# Altium PCB AEGIS_Junction_Box.PcbDoc (part 2 of 2)
Units mm, origin at the board's own origin, x right, y up, seen from the top; angles counter-clockwise.
Board outline 97 x 168.43 mm, 2 copper layers (TOP, BOTTOM), stack 1.57 mm thick; 144 components, 74 nets, 423 pads, 143 vias.
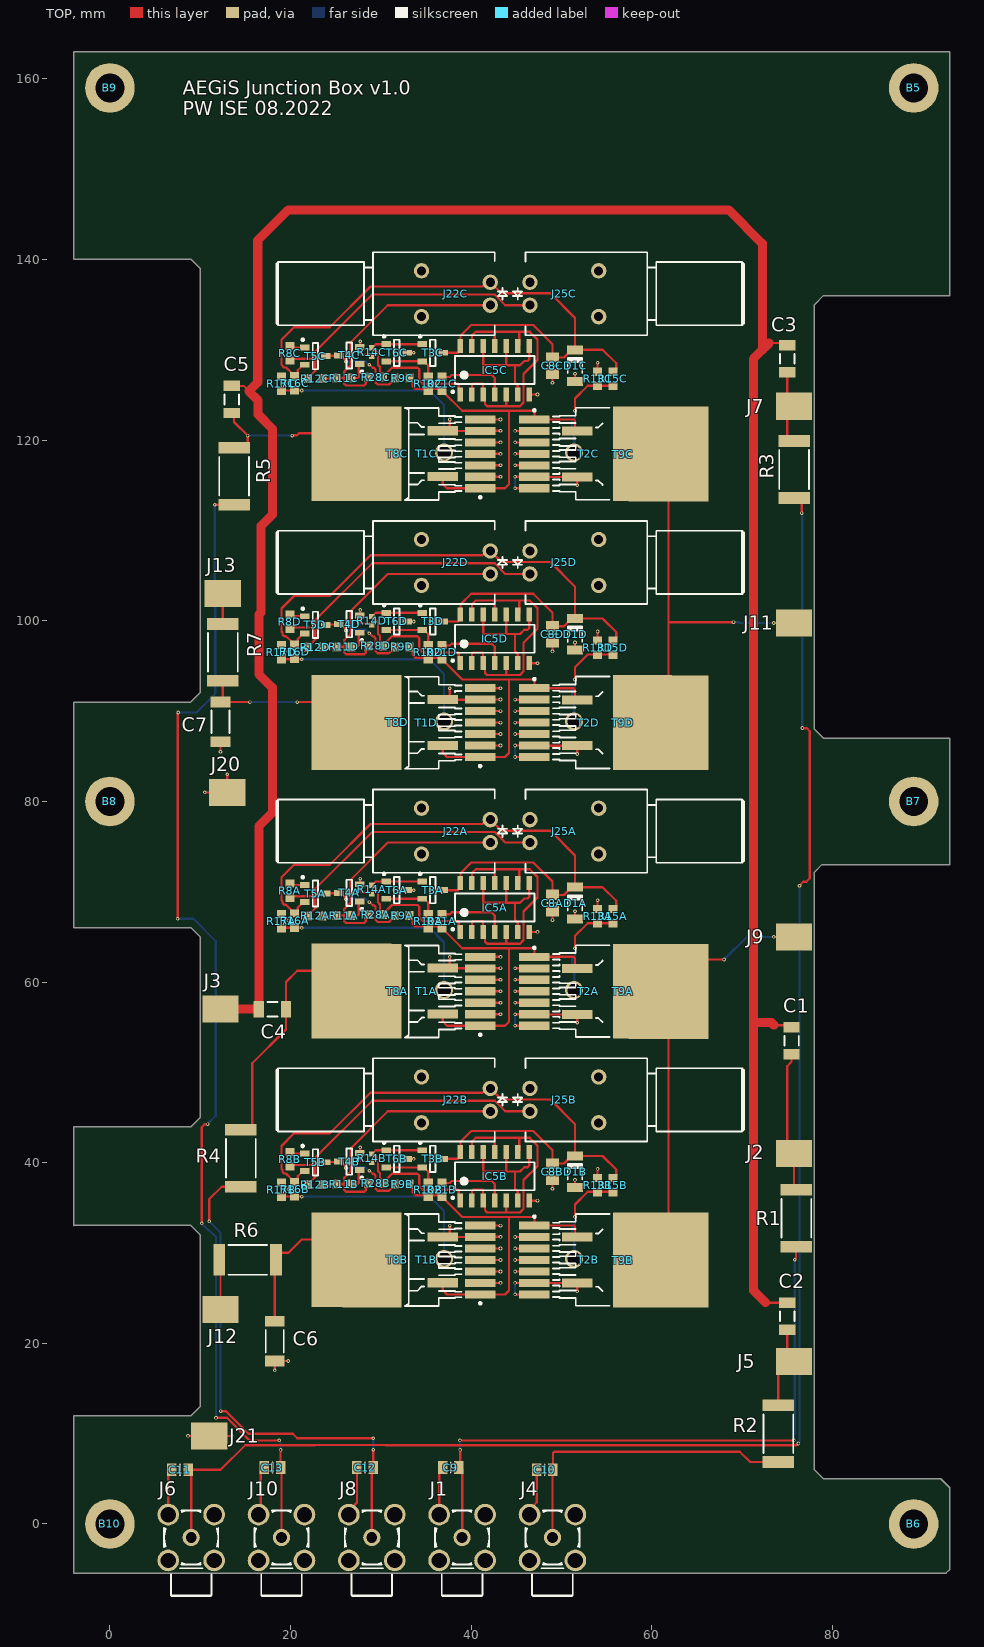
[diagram p0: TOP view]

## Via types
v1: diameter 0.4, hole 0.2, TOP to BOTTOM, tented both sides, 135 vias
v2: diameter 2, hole 1.5, TOP to BOTTOM, tented both sides, 8 vias

## Nets (pads, with @x,y where several pads share a name; then routed paths per layer and width w, separated by ;. In a path a pad name is that pad's centre, name@x,y a point inside that pad or via, vN(x,y) a via of type N, cw(c..) or ccw(c..) an arc to the next point about the centre after c; other vN are vias at no path point) (continued)
NetR13B_1: (continued)
  BOTTOM w0.25: v2(51.4,29.36) 51.4,31.876 51.2,32.076 51.2,32.867 51.5,33.167 v1(51.5,34)
NetR13C_1: R13C.1 R15C.1 SC1C.P | length 11
  TOP w0.25: v1(51.5,123.25) 51.5,124.619 52.906,126.025 54,126.025 55.64,126.025 R15C.1
  BOTTOM w0.25: v2(51.4,118.61) 51.4,121.126 51.2,121.326 51.2,122.117 51.5,122.417 v1(51.5,123.25)
NetR13D_1: R13D.1 R15D.1 SC1D.P | length 11
  TOP w0.25: v1(51.5,93.5) 51.5,94.869 52.906,96.275 54,96.275 55.64,96.275 R15D.1
  BOTTOM w0.25: v2(51.4,88.86) 51.4,91.376 51.2,91.576 51.2,92.367 51.5,92.667 v1(51.5,93.5)
NetR16A_1: R16A.1 R17A.1 SC1A.N | length 24
  TOP w0.25: R17A.1 19.05,66 20.44,66 R16A.1 20.46,66 v1(21.25,66)
  BOTTOM w0.25: v1(21.25,66) 35.392,66 37,64.392 v2(37,59.11)
NetR16B_1: R16B.1 R17B.1 SC1B.N | length 24
  TOP w0.25: R17B.1 19.05,36.25 20.44,36.25 R16B.1 20.46,36.25 v1(21.25,36.25)
  BOTTOM w0.25: v1(21.25,36.25) 35.392,36.25 37,34.642 v2(37,29.36)
NetR16C_1: R16C.1 R17C.1 SC1C.N | length 24
  TOP w0.25: R17C.1 19.05,125.5 20.44,125.5 R16C.1 20.46,125.5 v1(21.25,125.5)
  BOTTOM w0.25: v1(21.25,125.5) 35.392,125.5 37,123.892 v2(37,118.61)
NetR16D_1: R16D.1 R17D.1 SC1D.N | length 24
  TOP w0.25: R17D.1 19.05,95.75 20.44,95.75 R16D.1 20.46,95.75 v1(21.25,95.75)
  BOTTOM w0.25: v1(21.25,95.75) 35.392,95.75 37,94.142 v2(37,88.86)
Resonator: C1.1 C2.1 C3.1 C4.1 C5.1 J3.1 | length 281.8
  TOP w0.2: C5.1 14.803,126 15.383,125.42
  TOP w0.25: 72.609,24.5 C2.1 ; 73,130.75 74.75,130.75 C3.1 ; 73.521,55.229 75.246,55.229 C1.1
  TOP w1: J3.1 C4.1 16.5,77.25 18,78.75 18,92.6 16.5,94.1 16.5,100.672 16.725,100.897 16.725,110.475 18,111.75 18,121.25 16.4,122.85 16.4,124.403 15.383,125.42 16.371,126.408 16.371,142.121 19.75,145.5 68.5,145.5 72.25,141.75 72.25,130.25 ; 72.609,24.5 71.25,25.859 71.25,55.5 ; 73,130.75 72.5,130.25 72.25,130.25 ; 73.521,55.229 73.25,55.5 71.25,55.5 ; 71.25,55.5 71.25,129 72.25,130 72.25,130.25
VCCchA: C8A.2 D1A.1 IC5A.14 J22A.2 R15A.2 R16A.2 T3A.3 T5A.2 | length 72.5
  TOP w0.25: R16A.2@20.335,67.725 20.285,67.725 20.075,67.935 20.075,67.985 19.51,68.55 19.29,68.55 19.1,68.74 19.1,68.96 19,69.06 19,71.61 20.39,73 24.351,73 28.851,77.5 41.248,77.5 J22A.2@41.728,77.98 ; R16A.2 20.35,67.71 20.57,67.71 20.795,67.935 20.795,68.245 21.4,68.85 T5A.2 ; T3A.3 38.51,70.175 38.81,70.475 IC5A.14 38.81,72.06 40,73.25 46.875,73.25 49,71.125 C8A.2 50.275,69.65 51.125,70.5 D1A.1@50.75,70.875 ; J22A.2 43.35,76.75 48.771,76.75 51.5,74.021 D1A.1 54.55,70.5 56.05,69 56.05,68.4 55.725,68.075 R15A.2
VCCchB: C8B.2 D1B.1 IC5B.14 J22B.2 R15B.2 R16B.2 T3B.3 T5B.2 | length 72.5
  TOP w0.25: R16B.2@20.335,37.975 20.285,37.975 20.075,38.185 20.075,38.235 19.51,38.8 19.29,38.8 19.1,38.99 19.1,39.21 19,39.31 19,41.86 20.39,43.25 24.351,43.25 28.851,47.75 41.248,47.75 J22B.2@41.728,48.23 ; R16B.2 20.35,37.96 20.57,37.96 20.795,38.185 20.795,38.495 21.4,39.1 T5B.2 ; T3B.3 38.51,40.425 38.81,40.725 IC5B.14 38.81,42.31 40,43.5 46.875,43.5 49,41.375 C8B.2 50.275,39.9 51.125,40.75 D1B.1@50.75,41.125 ; J22B.2 43.35,47 48.771,47 51.5,44.271 D1B.1 54.55,40.75 56.05,39.25 56.05,38.65 55.725,38.325 R15B.2
VCCchC: C8C.2 D1C.1 IC5C.14 J22C.2 R15C.2 R16C.2 T3C.3 T5C.2 | length 72.5
  TOP w0.25: R16C.2@20.335,127.225 20.285,127.225 20.075,127.435 20.075,127.485 19.51,128.05 19.29,128.05 19,128.34 19,131.11 20.39,132.5 24.351,132.5 28.851,137 41.248,137 J22C.2@41.728,137.48 ; R16C.2 20.35,127.21 20.57,127.21 20.795,127.435 20.795,127.745 21.4,128.35 T5C.2 ; T3C.3 38.51,129.675 38.81,129.975 IC5C.14 38.81,131.56 40,132.75 46.875,132.75 49,130.625 C8C.2 50.275,129.15 51.125,130 D1C.1@50.75,130.375 ; J22C.2 43.35,136.25 48.771,136.25 51.5,133.521 D1C.1 54.55,130 56.05,128.5 56.05,127.9 55.725,127.575 R15C.2
VCCchD: C8D.2 D1D.1 IC5D.14 J22D.2 R15D.2 R16D.2 T3D.3 T5D.2 | length 72.5
  TOP w0.25: R16D.2@20.335,97.475 20.285,97.475 20.075,97.685 20.075,97.735 19.51,98.3 19.29,98.3 19.1,98.49 19.1,98.71 19,98.81 19,101.36 20.39,102.75 24.351,102.75 28.851,107.25 41.248,107.25 J22D.2@41.728,107.73 ; R16D.2 20.35,97.46 20.57,97.46 20.795,97.685 20.795,97.995 21.4,98.6 T5D.2 ; T3D.3 38.51,99.925 38.81,100.225 IC5D.14 38.81,101.81 40,103 46.875,103 49,100.875 C8D.2 50.275,99.4 51.125,100.25 D1D.1@50.75,100.625 ; J22D.2 43.35,106.5 48.771,106.5 51.5,103.771 D1D.1 54.55,100.25 56.05,98.75 56.05,98.15 55.725,97.825 R15D.2
pads on no net: J22A.3 J22A.4 J22B.3 J22B.4 J22C.3 J22C.4 J22D.3 J22D.4 J25A.3 J25A.4 J25B.3 J25B.4 J25C.3 J25C.4 J25D.3 J25D.4

## Polygon pours and split planes (outlines as drawn)
GND on BOTTOM "GND_L02_P010" (solid, remove dead copper, pour order 10): -3.75,162.5 92.75,162.5 92.75,136.25 78.75,136.25 77.25,134.75 77.25,88.25 78.75,86.75 92.75,86.75 92.75,73.25 78.75,73.25 77.25,71.75 77.25,6.25 78.75,4.75 91.75,4.75 92.75,3.75 92.75,-4.9 92.4,-5.25 -3.75,-5.25 -3.75,11.775 9.275,11.775 11.25,13.75 11.25,31.25 9.25,33.25 -3.75,33.25 -3.75,43.725 9.225,43.725 11.25,45.75 11.25,64.286 9.286,66.25 -3.75,66.25 -3.75,90.75 9.25,90.75 11,92.5 11,138.741 9.491,140.25 -3.75,140.25 -3.75,150.013 11.987,150.013 14.75,147.25 14.75,124.25 14.75,23.75 17.5,21 69.75,21 73.5,24.75 73.5,60 74.25,60.75 74.25,141.75 68.75,147.25 14.75,147.25 11.987,150.013 -3.75,150.013
GNDchD on BOTTOM "GNDCHD_L02_P007" (solid, remove dead copper, pour order 7): 36,95.25 18,95.25 18,109.5 68,109.5 68,95.75 52.25,95.75 52.393,84.75 36,84.75
GNDchB on BOTTOM "GNDCHB_L02_P009" (solid, remove dead copper, pour order 9): 36,35.75 18,35.75 18,50 68,50 68,36.25 52.25,36.25 52.393,25.25 36,25.25
GNDchA on BOTTOM "GNDCHA_L02_P008" (solid, remove dead copper, pour order 8): 36,65.5 18,65.5 18,79.75 68,79.75 68,66 52.25,66 52.393,55 36,55
GNDchC on BOTTOM "GNDCHC_L02_P006" (solid, remove dead copper, pour order 6): 36,125 18,125 18,139.25 68,139.25 68,125.5 52.25,125.5 52.393,114.5 36,114.5

## Silkscreen, mask and mechanical layers (free items; w line width, h text height)
TopOverlay:
  text "AEGiS Junction Box v1.0 / PW ISE 08.2022" at 8.079,155.98 h1.52
Mechanical 1:
  lines w0.1: -3.997,-5.431 92.581,-5.431
  lines w0.127: -3.997,-5.431 -4,-5.428 -4,12 9,12 10,13 10,32 8.95,33.05 -3.95,33.05 -4,33 -4,44 9,44 10,45 10,65 9,66 -4,66 -4,91 8.95,91 10,92.05 10,111 10,139 9,140 -4,140 -4,163 93,163 93,136 79,136 78,135 78,88 79,87 93,87 93,73 78.85,73 78,72.15 78,6 79,5 92,5 92.987,4.013 92.987,-5.025 92.581,-5.431
  lines w0.254: 676.483,278.953 676.931,279.401
Mechanical 15:
  lines w0.127: -10,80 93,80 ; -6,159 92,159 ; 0,-3 0,159 ; 0,0 97,0 ; 15.4,106.6 42.57,106.6 ; 15.4,135.6 42.57,135.6 ; 15.775,47.615 42.945,47.615 ; 15.95,76.46 43.12,76.46 ; 46.95,106.6 73,106.6 ; 46.95,135.6 73,135.6 ; 47.325,47.614 73.375,47.614 ; 47.5,76.46 73.55,76.46 ; 89,-4 89,4 ; 89,3 89,168